# Altium PCB teckduino.PcbDoc
Units mm, origin at the board's own origin, x right, y up, seen from the top; angles counter-clockwise.
Board outline 70 x 54.99 mm, 2 copper layers (Top Layer, Bottom Layer); 42 components, 0 nets, 221 pads, 13 vias.
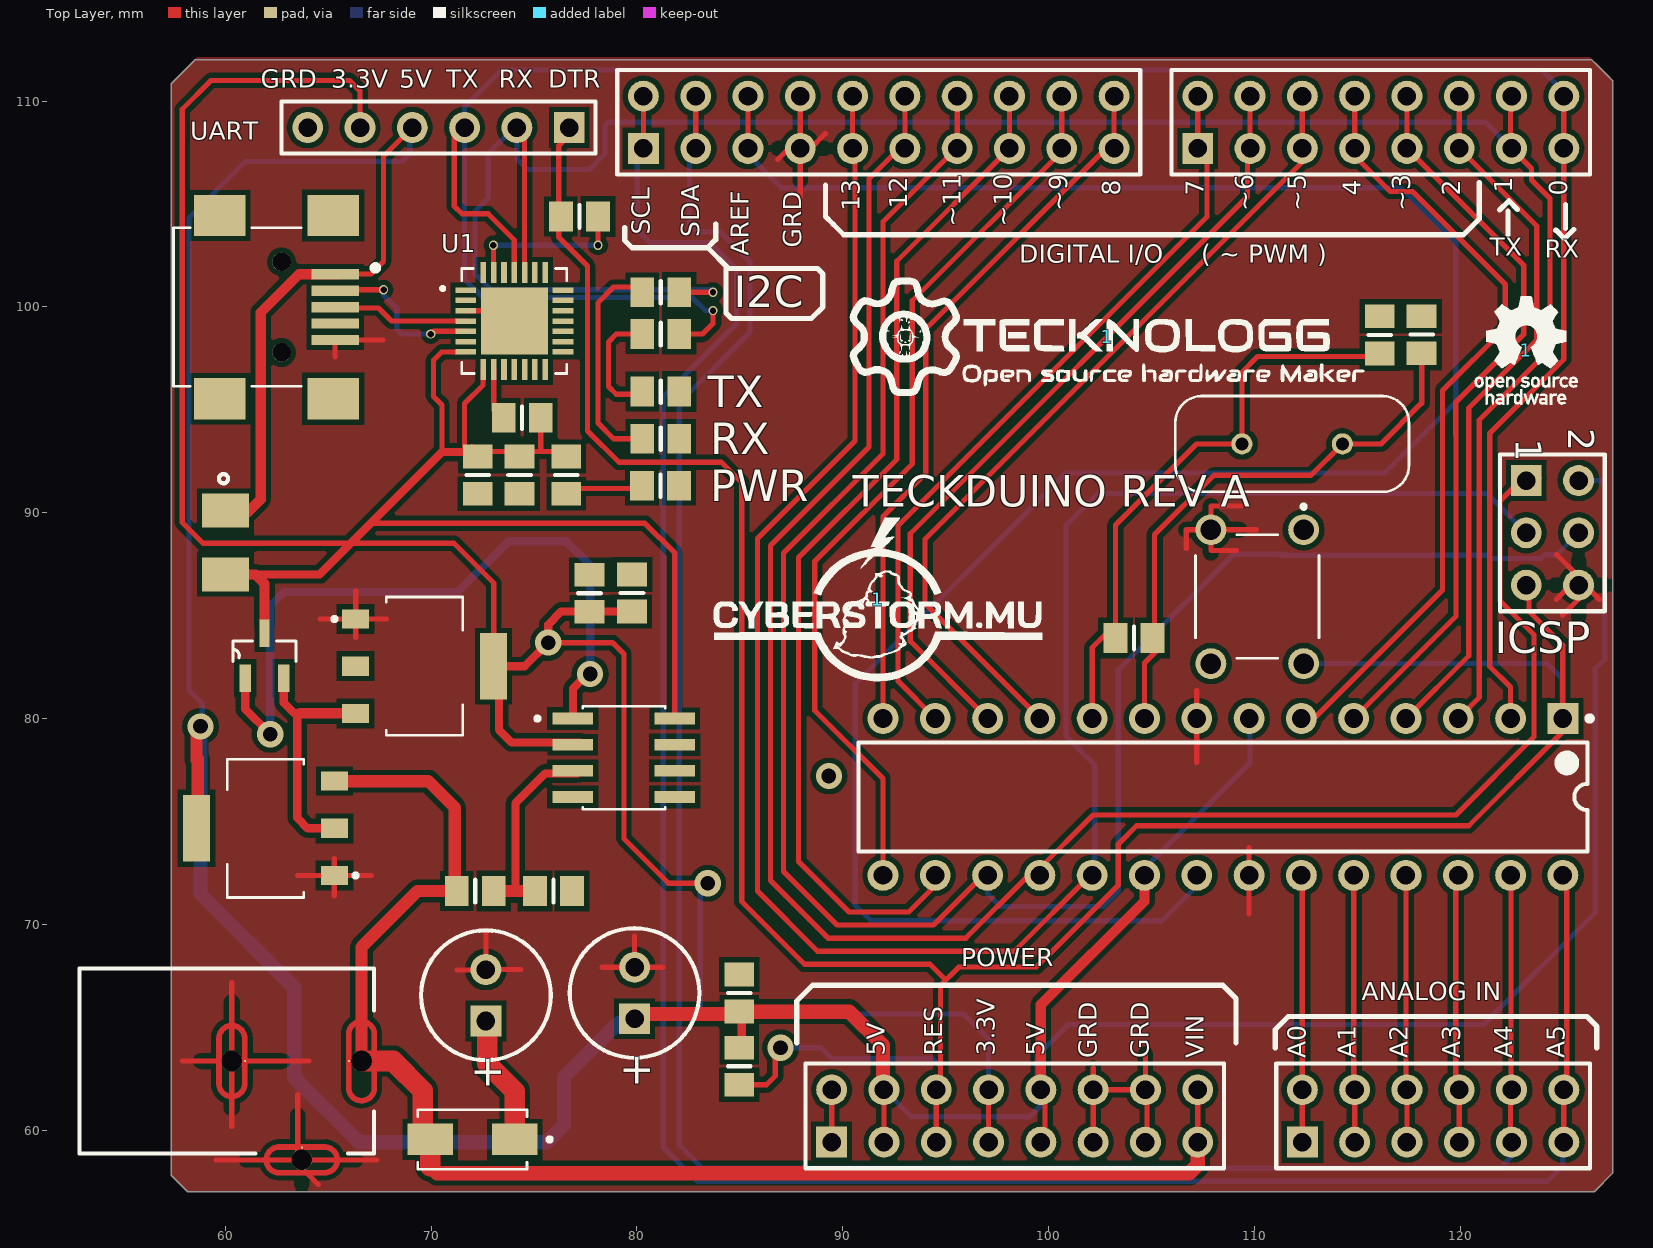
[diagram p0: Top Layer view]
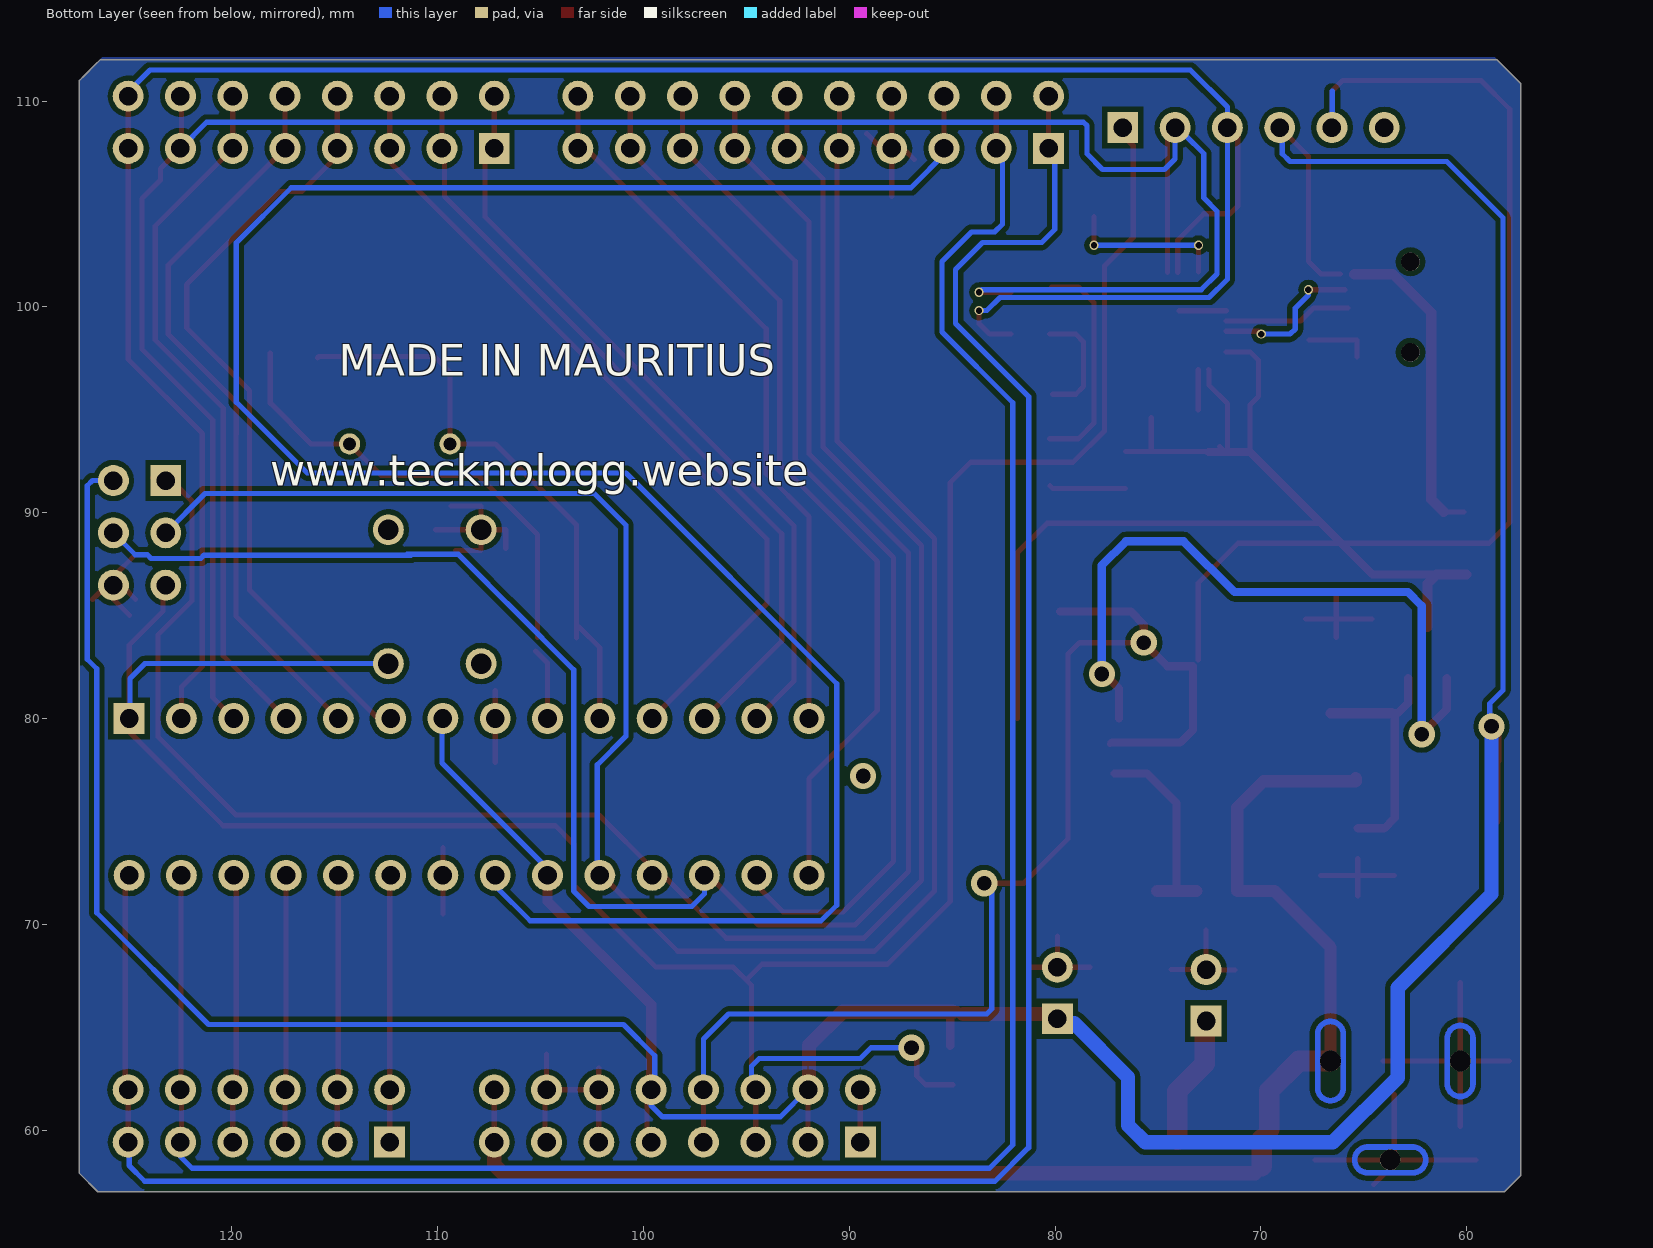
[diagram p1: Bottom Layer view, seen from below]

## Layer stack, top to bottom
Top Solder: solder mask 0.0102, Solder Resist, Dk 3.5
Top Layer: signal copper 0.0356
Dielectric 1: dielectric 0.32, FR-4, Dk 4.8
Bottom Layer: signal copper 0.0356
Bottom Solder: solder mask 0.0102, Solder Resist, Dk 3.5

## Board outline
57.381,57.808 58.166,57.023 126.492,57.023 127.381,57.912 127.381,110.998 127.127,111.252 126.619,111.76 126.365,112.014 58.547,112.014 58.293,111.76 57.381,110.848

## Design rules (kind name [scope] priority, off if disabled: settings)
Clearance [All] p1: gap=0.254 ignorepadtopadclearanceinfootprint=FALSE except(0: Arc-Hole Track-Hole SMDPad-Hole THPad-Hole Via-Hole Fill-Hole Poly-Hole Region-Hole Text-Hole)
PolygonConnect [All] p1: connectstyle=Relief reliefconductorwidth=0.254 reliefentries=4 polygonreliefangle="90 Angle" airgapwidth=0.254
RoutingVias [All] p1: holewidth=0.711 width=1.27 viastyle="Through Hole" minholewidth=0.711 minwidth=1.27 maxholewidth=0.711 maxwidth=1.27
SolderMaskExpansion [All] p1: expansion=0.102
Width [All] p1: maxlimit=0.254 minlimit=0.254 preferedwidth=0.254
30 further rules are at their usual default settings.

## Components (designator, comment, footprint, x,y, rotation, side; value= is the part's Value field where it differs from the comment)
1 "" IMAGE 91.702,85.794 r0 top
1 "" IMAGE 123.19,97.884 r0 top
1 "" IMAGE 102.833,98.552 r0 top
? "Comment" CAPC2012X140N 74.422,94.615 r0 top
? "Comment" SW_1825910-7 110.125,85.928 r270 top
? "Comment" HDR1X6 76.708,108.712 r180 top
? "Comment" CAPC2012X140N 104.14,83.923 r180 top
? "Comment" CAPC2012X140N 118.11,98.653 r270 top
? "Comment" CAPC2012X140N 116.078,98.639 r270 top
? "Comment" XTAL_ECS-60-32-4XDN 111.819,93.345 r180 top
? "Comment" CAPMP3528X210N 60.016,88.556 r270 top
? "Comment" SOT95P237X112-3N 61.908,83.058 r90 top
? "Comment" CAPC2012X140N 84.963,66.675 r90 top
? "Comment" CAPC2012X140N 84.963,63.119 r90 top
? "Comment" CAPC2012X140N 79.756,86.106 r90 top
? "Comment" CAPC2012X140N 77.688,86.095 r90 top
? "Comment" CAPC2012X140N 72.147,71.628 r0 top
? "Comment" CAPC2012X140N 75.946,71.628 r0 top
? "Comment" 94SP-C' 72.661,66.568 r90 top
? "Comment" 94SP-C' 79.883,66.675 r90 top
? "Comment" GCT_DCJ235-05-A-XX-X_REVA 60.071,63.373 r270 top
? "Comment" TE_1734035-3_1734035-3(Primary) 61.688,99.99 r270 top
? "Comment" CAPC2012X140N 81.153,100.711 r180 top
? "Comment" CAPC2012X140N 81.153,98.679 r180 top
? "Comment" CAPC2012X140N 77.205,104.394 r180 top
? "Comment" CAPC2012X140N 81.142,91.313 r180 top
? "Comment" CAPC2012X140N 81.153,93.599 r180 top
? "Comment" CAPC2012X140N 72.263,91.832 r270 top
? "Comment" CAPC2012X140N 74.295,91.832 r90 top
? "Comment" CAPC2012X140N 81.153,95.885 r0 top
? "Comment" CAPC2012X140N 76.562,91.832 r90 top
? "Comment" SOIC127P600X175-8N 79.364,78.105 r0 top
? "Comment" DIOM505270X240_M7(Primary) 72.009,59.563 r180 top
? "Comment" SOT229P700X180-4N 69.68,82.55 r270 top
? "Comment" SOT229P700X180-4N 61.953,74.676 r90 top
? "Comment" HDR2X3 123.19,91.567 r270 top
? "Comment" QFN50P500X500X80-29N 74.041,99.314 r0 top
? "Comment" 28P3 108.458,76.2 r270 top
? "Comment" HDR2X8 107.235,107.696 r0 top
? "Comment" HDR2X8 89.455,59.436 r0 top
? "Comment" HDR2X6 112.315,59.436 r0 top
? "Comment" HDR2X10 80.311,107.696 r0 top

## Footprints (in the part's own frame and the unit in brackets; to place one, negate y for a bottom-side part, rotate by r counter-clockwise, add the part's x,y. Pads: shape width x height; smd on the part's side, far side on the other; paste and mask are expansions set on the pad)
28P3 [mm] "DIP, 28-Leads, Row Spacing 7.62mm, Pitch 2.54mm, Body 34.67x7.3mm"
  rect 1.5x1.5 hole 0.9: 1(-3.81,16.51)
  round 1.5 hole 0.9: 2(-3.81,13.97) 3(-3.81,11.43) 4(-3.81,8.89) 5(-3.81,6.35) 6(-3.81,3.81) 7(-3.81,1.27) 8(-3.81,-1.27) 9(-3.81,-3.81) 10(-3.81,-6.35) 11(-3.81,-8.89) 12(-3.81,-11.43) 13(-3.81,-13.97) 14(-3.81,-16.51) 15(3.81,-16.51) 16(3.81,-13.97) 17(3.81,-11.43) 18(3.81,-8.89) 19(3.81,-6.35) 20(3.81,-3.81) 21(3.81,-1.27) 22(3.81,1.27) 23(3.81,3.81) 24(3.81,6.35) 25(3.81,8.89) 26(3.81,11.43) 27(3.81,13.97) 28(3.81,16.51)
  silkscreen extent -3.93,-17.7 2.65,17.94, body extent -3.6,-17.65 3.6,17.65, height 4.58
94SP-C' [mm] "Capacitor, Electrolytic, Radial; Body 6.3 x 5 mm (Dia.xH typ); Pin Spacing 2.5 mm (typ)"
  rect 1.5x1.5 hole 0.9: 1(-1.25,0)
  round 1.5 hole 0.9: 2(1.25,0)
  silkscreen extent -3.15,-3.15 3.15,3.15
CAPC2012X140N [mm]
  rect 1.15x1.45 smd: 1(-0.9,0) 2(0.9,0)
  silkscreen extent 0,-0.55 0,0.55
CAPMP3528X210N [mm]
  rect 1.65x2.3 smd: 1(-1.55,0) 2(1.55,0)
  silkscreen extent -3.32,-0.32 -2.88,0.12
DIOM505270X240_M7(Primary) [mm]
  rect 2.21x1.53 smd: A(2.05,0) C(-2.05,0)
  silkscreen extent -3.85,-1.45 2.65,1.45
GCT_DCJ235-05-A-XX-X_REVA [mm]
  rect 0.1x0.1 smd: 1(0,5.95) 2(0,0.9) 3(4.2,3.65)
  round 1 hole 1 unplated: None(0,6.55) None(0,0.25) None(4.8,3.65)
  Top Layer region: 0,0.75 0,1 -1.12,1 -1.159,0.998 -1.198,0.994 -1.237,0.988 -1.275,0.98 -1.313,0.969 -1.35,0.957 -1.387,0.943 -1.423,0.927 -1.458,0.909 -1.492,0.89 -1.525,0.868 -1.557,0.845 -1.587,0.821 -1.616,0.794 -1.644,0.766 -1.67,0.737 -1.695,0.707 -1.718,0.675 -1.74,0.642 -1.759,0.608 -1.777,0.573 -1.793,0.537 -1.807,0.5 -1.819,0.463 -1.83,0.425 -1.838,0.387 -1.844,0.348 -1.848,0.309 -1.85,0.27 -1.85,0.23 -1.848,0.191 -1.844,0.152 -1.838,0.113 -1.83,0.075 -1.819,0.037 -1.807,0 -1.793,-0.037 -1.777,-0.073 -1.759,-0.108 -1.74,-0.142 -1.718,-0.175 -1.695,-0.207 -1.67,-0.237 -1.644,-0.266 -1.616,-0.294 -1.587,-0.32 -1.557,-0.345 -1.525,-0.368 -1.492,-0.39 -1.458,-0.409 -1.423,-0.427 -1.387,-0.443 -1.35,-0.457 -1.313,-0.469 -1.275,-0.48 -1.237,-0.488 -1.198,-0.494 -1.159,-0.498 -1.12,-0.5 0,-0.5 0,-0.25 -1.113,-0.25 -1.139,-0.249 -1.165,-0.246 -1.191,-0.242 -1.217,-0.236 -1.242,-0.23 -1.267,-0.221 -1.291,-0.212 -1.315,-0.201 -1.339,-0.19 -1.361,-0.176 -1.383,-0.162 -1.404,-0.147 -1.425,-0.13 -1.444,-0.113 -1.463,-0.094 -1.48,-0.075 -1.497,-0.054 -1.512,-0.033 -1.526,-0.011 -1.54,0.011 -1.551,0.035 -1.562,0.059 -1.571,0.083 -1.58,0.108 -1.586,0.133 -1.592,0.159 -1.596,0.185 -1.599,0.211 -1.6,0.237 -1.6,0.263 -1.599,0.289 -1.596,0.315 -1.592,0.341 -1.586,0.367 -1.58,0.392 -1.571,0.417 -1.562,0.441 -1.551,0.465 -1.54,0.489 -1.526,0.511 -1.512,0.533 -1.497,0.554 -1.48,0.575 -1.463,0.594 -1.444,0.613 -1.425,0.63 -1.404,0.647 -1.383,0.662 -1.361,0.676 -1.339,0.69 -1.315,0.701 -1.291,0.712 -1.267,0.721 -1.242,0.73 -1.217,0.736 -1.191,0.742 -1.165,0.746 -1.139,0.749 -1.113,0.75
  Top Layer region: 0,-0.25 0,-0.5 1.12,-0.5 1.159,-0.498 1.198,-0.494 1.237,-0.488 1.275,-0.48 1.313,-0.469 1.35,-0.457 1.387,-0.443 1.423,-0.427 1.458,-0.409 1.492,-0.39 1.525,-0.368 1.557,-0.345 1.587,-0.321 1.616,-0.294 1.644,-0.266 1.67,-0.237 1.695,-0.207 1.718,-0.175 1.74,-0.142 1.759,-0.108 1.777,-0.073 1.793,-0.037 1.807,0 1.819,0.037 1.83,0.075 1.838,0.113 1.844,0.152 1.848,0.191 1.85,0.23 1.85,0.27 1.848,0.309 1.844,0.348 1.838,0.387 1.83,0.425 1.819,0.463 1.807,0.5 1.793,0.537 1.777,0.573 1.759,0.608 1.74,0.642 1.718,0.675 1.695,0.707 1.67,0.737 1.644,0.766 1.616,0.794 1.587,0.82 1.557,0.845 1.525,0.868 1.492,0.89 1.458,0.909 1.423,0.927 1.387,0.943 1.35,0.957 1.313,0.969 1.275,0.98 1.237,0.988 1.198,0.994 1.159,0.998 1.12,1 0,1 0,0.75 1.113,0.75 1.139,0.749 1.165,0.746 1.191,0.742 1.217,0.736 1.242,0.73 1.267,0.721 1.291,0.712 1.315,0.701 1.339,0.69 1.361,0.676 1.383,0.662 1.404,0.647 1.425,0.63 1.444,0.613 1.463,0.594 1.48,0.575 1.497,0.554 1.512,0.533 1.526,0.511 1.54,0.489 1.551,0.465 1.562,0.441 1.571,0.417 1.58,0.392 1.586,0.367 1.592,0.341 1.596,0.315 1.599,0.289 1.6,0.263 1.6,0.237 1.599,0.211 1.596,0.185 1.592,0.159 1.586,0.133 1.58,0.108 1.571,0.083 1.562,0.059 1.551,0.035 1.54,0.011 1.526,-0.011 1.512,-0.033 1.497,-0.054 1.48,-0.075 1.463,-0.094 1.444,-0.113 1.425,-0.13 1.404,-0.147 1.383,-0.162 1.361,-0.176 1.339,-0.19 1.315,-0.201 1.291,-0.212 1.267,-0.221 1.242,-0.23 1.217,-0.236 1.191,-0.242 1.165,-0.246 1.139,-0.249 1.113,-0.25
  Top Layer region: 4.3,3.65 4.05,3.65 4.05,2.53 4.052,2.491 4.056,2.452 4.062,2.413 4.07,2.375 4.081,2.337 4.093,2.3 4.107,2.263 4.123,2.227 4.141,2.192 4.16,2.158 4.182,2.125 4.205,2.093 4.229,2.063 4.256,2.034 4.284,2.006 4.313,1.98 4.343,1.955 4.375,1.932 4.408,1.91 4.442,1.891 4.477,1.873 4.513,1.857 4.55,1.843 4.587,1.831 4.625,1.82 4.663,1.812 4.702,1.806 4.741,1.802 4.78,1.8 4.82,1.8 4.859,1.802 4.898,1.806 4.937,1.812 4.975,1.82 5.013,1.831 5.05,1.843 5.087,1.857 5.123,1.873 5.158,1.891 5.192,1.91 5.225,1.932 5.257,1.955 5.287,1.98 5.316,2.006 5.344,2.034 5.37,2.063 5.395,2.093 5.418,2.125 5.44,2.158 5.459,2.192 5.477,2.227 5.493,2.263 5.507,2.3 5.519,2.337 5.53,2.375 5.538,2.413 5.544,2.452 5.548,2.491 5.55,2.53 5.55,3.65 5.3,3.65 5.3,2.537 5.299,2.511 5.296,2.485 5.292,2.459 5.286,2.433 5.28,2.408 5.271,2.383 5.262,2.359 5.251,2.335 5.24,2.311 5.226,2.289 5.212,2.267 5.197,2.246 5.18,2.225 5.163,2.206 5.144,2.187 5.125,2.17 5.104,2.153 5.083,2.138 5.061,2.124 5.039,2.11 5.015,2.099 4.991,2.088 4.967,2.079 4.942,2.07 4.917,2.064 4.891,2.058 4.865,2.054 4.839,2.051 4.813,2.05 4.787,2.05 4.761,2.051 4.735,2.054 4.709,2.058 4.683,2.064 4.658,2.07 4.633,2.079 4.609,2.088 4.585,2.099 4.561,2.11 4.539,2.124 4.517,2.138 4.496,2.153 4.475,2.17 4.456,2.187 4.437,2.206 4.42,2.225 4.403,2.246 4.388,2.267 4.374,2.289 4.36,2.311 4.349,2.335 4.338,2.359 4.329,2.383 4.32,2.408 4.314,2.433 4.308,2.459 4.304,2.485 4.301,2.511 4.3,2.537
  Top Layer region: 5.3,3.65 5.55,3.65 5.55,4.77 5.548,4.809 5.544,4.848 5.538,4.887 5.53,4.925 5.519,4.963 5.507,5 5.493,5.037 5.477,5.073 5.459,5.108 5.44,5.142 5.418,5.175 5.395,5.207 5.37,5.237 5.344,5.266 5.316,5.294 5.287,5.32 5.257,5.345 5.225,5.368 5.192,5.39 5.158,5.409 5.123,5.427 5.087,5.443 5.05,5.457 5.013,5.469 4.975,5.48 4.937,5.488 4.898,5.494 4.859,5.498 4.82,5.5 4.78,5.5 4.741,5.498 4.702,5.494 4.663,5.488 4.625,5.48 4.587,5.469 4.55,5.457 4.513,5.443 4.477,5.427 4.442,5.409 4.408,5.39 4.375,5.368 4.343,5.345 4.313,5.32 4.284,5.294 4.256,5.266 4.229,5.237 4.205,5.207 4.182,5.175 4.16,5.142 4.141,5.108 4.123,5.073 4.107,5.037 4.093,5 4.081,4.963 4.07,4.925 4.062,4.887 4.056,4.848 4.052,4.809 4.05,4.77 4.05,3.65 4.3,3.65 4.3,4.763 4.301,4.789 4.304,4.815 4.308,4.841 4.314,4.867 4.32,4.892 4.329,4.917 4.338,4.941 4.349,4.965 4.36,4.989 4.374,5.011 4.388,5.033 4.403,5.054 4.42,5.075 4.437,5.094 4.456,5.113 4.475,5.13 4.496,5.147 4.517,5.162 4.539,5.176 4.561,5.19 4.585,5.201 4.609,5.212 4.633,5.221 4.658,5.23 4.683,5.236 4.709,5.242 4.735,5.246 4.761,5.249 4.787,5.25 4.813,5.25 4.839,5.249 4.865,5.246 4.891,5.242 4.917,5.236 4.942,5.23 4.967,5.221 4.991,5.212 5.015,5.201 5.039,5.19 5.061,5.176 5.083,5.162 5.104,5.147 5.125,5.13 5.144,5.113 5.163,5.094 5.18,5.075 5.197,5.054 5.212,5.033 5.226,5.011 5.24,4.989 5.251,4.965 5.262,4.941 5.271,4.917 5.28,4.892 5.286,4.867 5.292,4.841 5.296,4.815 5.299,4.789 5.3,4.763
  Top Layer region: 0,7.05 0,7.3 -1.32,7.3 -1.359,7.298 -1.398,7.294 -1.437,7.288 -1.475,7.28 -1.513,7.269 -1.55,7.257 -1.587,7.243 -1.623,7.227 -1.658,7.209 -1.692,7.19 -1.725,7.168 -1.757,7.145 -1.787,7.12 -1.816,7.094 -1.844,7.066 -1.87,7.037 -1.895,7.007 -1.918,6.975 -1.94,6.942 -1.959,6.908 -1.977,6.873 -1.993,6.837 -2.007,6.8 -2.019,6.763 -2.03,6.725 -2.038,6.687 -2.044,6.648 -2.048,6.609 -2.05,6.57 -2.05,6.53 -2.048,6.491 -2.044,6.452 -2.038,6.413 -2.03,6.375 -2.019,6.337 -2.007,6.3 -1.993,6.263 -1.977,6.227 -1.959,6.192 -1.94,6.158 -1.918,6.125 -1.895,6.093 -1.87,6.063 -1.844,6.034 -1.816,6.006 -1.787,5.98 -1.757,5.955 -1.725,5.932 -1.692,5.91 -1.658,5.891 -1.623,5.873 -1.587,5.857 -1.55,5.843 -1.513,5.831 -1.475,5.82 -1.437,5.812 -1.398,5.806 -1.359,5.802 -1.32,5.8 0,5.8 0,6.05 -1.313,6.05 -1.339,6.051 -1.365,6.054 -1.391,6.058 -1.417,6.064 -1.442,6.07 -1.467,6.079 -1.491,6.088 -1.515,6.099 -1.539,6.11 -1.561,6.124 -1.583,6.138 -1.604,6.153 -1.625,6.17 -1.644,6.187 -1.663,6.206 -1.68,6.225 -1.697,6.246 -1.712,6.267 -1.726,6.289 -1.74,6.311 -1.751,6.335 -1.762,6.359 -1.771,6.383 -1.78,6.408 -1.786,6.433 -1.792,6.459 -1.796,6.485 -1.799,6.511 -1.8,6.537 -1.8,6.563 -1.799,6.589 -1.796,6.615 -1.792,6.641 -1.786,6.667 -1.78,6.692 -1.771,6.717 -1.762,6.741 -1.751,6.765 -1.74,6.789 -1.726,6.811 -1.712,6.833 -1.697,6.854 -1.68,6.875 -1.663,6.894 -1.644,6.913 -1.625,6.93 -1.604,6.947 -1.583,6.962 -1.561,6.976 -1.539,6.99 -1.515,7.001 -1.491,7.012 -1.467,7.021 -1.442,7.03 -1.417,7.036 -1.391,7.042 -1.365,7.046 -1.339,7.049 -1.313,7.05
  Top Layer region: 0,6.05 0,5.8 1.32,5.8 1.359,5.802 1.398,5.806 1.437,5.812 1.475,5.82 1.513,5.831 1.55,5.843 1.587,5.857 1.623,5.873 1.658,5.891 1.692,5.91 1.725,5.932 1.757,5.955 1.787,5.98 1.816,6.006 1.844,6.034 1.87,6.063 1.895,6.093 1.918,6.125 1.94,6.158 1.959,6.192 1.977,6.227 1.993,6.263 2.007,6.3 2.019,6.337 2.03,6.375 2.038,6.413 2.044,6.452 2.048,6.491 2.05,6.53 2.05,6.57 2.048,6.609 2.044,6.648 2.038,6.687 2.03,6.725 2.019,6.763 2.007,6.8 1.993,6.837 1.977,6.873 1.959,6.908 1.94,6.942 1.918,6.975 1.895,7.007 1.87,7.037 1.844,7.066 1.816,7.094 1.787,7.12 1.757,7.145 1.725,7.168 1.692,7.19 1.658,7.209 1.623,7.227 1.587,7.243 1.55,7.257 1.513,7.269 1.475,7.28 1.437,7.288 1.398,7.294 1.359,7.298 1.32,7.3 0,7.3 0,7.05 1.313,7.05 1.339,7.049 1.365,7.046 1.391,7.042 1.417,7.036 1.442,7.03 1.467,7.021 1.491,7.012 1.515,7.001 1.539,6.99 1.561,6.976 1.583,6.962 1.604,6.947 1.625,6.93 1.644,6.913 1.663,6.894 1.68,6.875 1.697,6.854 1.712,6.833 1.726,6.811 1.74,6.789 1.751,6.765 1.762,6.741 1.771,6.717 1.78,6.692 1.786,6.667 1.792,6.641 1.796,6.615 1.799,6.589 1.8,6.563 1.8,6.537 1.799,6.511 1.796,6.485 1.792,6.459 1.786,6.433 1.78,6.408 1.771,6.383 1.762,6.359 1.751,6.335 1.74,6.311 1.726,6.289 1.712,6.267 1.697,6.246 1.68,6.225 1.663,6.206 1.644,6.187 1.625,6.17 1.604,6.153 1.583,6.138 1.561,6.124 1.539,6.11 1.515,6.099 1.491,6.088 1.467,6.079 1.442,6.07 1.417,6.064 1.391,6.058 1.365,6.054 1.339,6.051 1.313,6.05
  Bottom Layer region: 0,0.75 0,1 -1.12,1 -1.159,0.998 -1.198,0.994 -1.237,0.988 -1.275,0.98 -1.313,0.969 -1.35,0.957 -1.387,0.943 -1.423,0.927 -1.458,0.909 -1.492,0.89 -1.525,0.868 -1.557,0.845 -1.587,0.821 -1.616,0.794 -1.644,0.766 -1.67,0.737 -1.695,0.707 -1.718,0.675 -1.74,0.642 -1.759,0.608 -1.777,0.573 -1.793,0.537 -1.807,0.5 -1.819,0.463 -1.83,0.425 -1.838,0.387 -1.844,0.348 -1.848,0.309 -1.85,0.27 -1.85,0.23 -1.848,0.191 -1.844,0.152 -1.838,0.113 -1.83,0.075 -1.819,0.037 -1.807,0 -1.793,-0.037 -1.777,-0.073 -1.759,-0.108 -1.74,-0.142 -1.718,-0.175 -1.695,-0.207 -1.67,-0.237 -1.644,-0.266 -1.616,-0.294 -1.587,-0.32 -1.557,-0.345 -1.525,-0.368 -1.492,-0.39 -1.458,-0.409 -1.423,-0.427 -1.387,-0.443 -1.35,-0.457 -1.313,-0.469 -1.275,-0.48 -1.237,-0.488 -1.198,-0.494 -1.159,-0.498 -1.12,-0.5 0,-0.5 0,-0.25 -1.113,-0.25 -1.139,-0.249 -1.165,-0.246 -1.191,-0.242 -1.217,-0.236 -1.242,-0.23 -1.267,-0.221 -1.291,-0.212 -1.315,-0.201 -1.339,-0.19 -1.361,-0.176 -1.383,-0.162 -1.404,-0.147 -1.425,-0.13 -1.444,-0.113 -1.463,-0.094 -1.48,-0.075 -1.497,-0.054 -1.512,-0.033 -1.526,-0.011 -1.54,0.011 -1.551,0.035 -1.562,0.059 -1.571,0.083 -1.58,0.108 -1.586,0.133 -1.592,0.159 -1.596,0.185 -1.599,0.211 -1.6,0.237 -1.6,0.263 -1.599,0.289 -1.596,0.315 -1.592,0.341 -1.586,0.367 -1.58,0.392 -1.571,0.417 -1.562,0.441 -1.551,0.465 -1.54,0.489 -1.526,0.511 -1.512,0.533 -1.497,0.554 -1.48,0.575 -1.463,0.594 -1.444,0.613 -1.425,0.63 -1.404,0.647 -1.383,0.662 -1.361,0.676 -1.339,0.69 -1.315,0.701 -1.291,0.712 -1.267,0.721 -1.242,0.73 -1.217,0.736 -1.191,0.742 -1.165,0.746 -1.139,0.749 -1.113,0.75
  Bottom Layer region: 0,-0.25 0,-0.5 1.12,-0.5 1.159,-0.498 1.198,-0.494 1.237,-0.488 1.275,-0.48 1.313,-0.469 1.35,-0.457 1.387,-0.443 1.423,-0.427 1.458,-0.409 1.492,-0.39 1.525,-0.368 1.557,-0.345 1.587,-0.321 1.616,-0.294 1.644,-0.266 1.67,-0.237 1.695,-0.207 1.718,-0.175 1.74,-0.142 1.759,-0.108 1.777,-0.073 1.793,-0.037 1.807,0 1.819,0.037 1.83,0.075 1.838,0.113 1.844,0.152 1.848,0.191 1.85,0.23 1.85,0.27 1.848,0.309 1.844,0.348 1.838,0.387 1.83,0.425 1.819,0.463 1.807,0.5 1.793,0.537 1.777,0.573 1.759,0.608 1.74,0.642 1.718,0.675 1.695,0.707 1.67,0.737 1.644,0.766 1.616,0.794 1.587,0.82 1.557,0.845 1.525,0.868 1.492,0.89 1.458,0.909 1.423,0.927 1.387,0.943 1.35,0.957 1.313,0.969 1.275,0.98 1.237,0.988 1.198,0.994 1.159,0.998 1.12,1 0,1 0,0.75 1.113,0.75 1.139,0.749 1.165,0.746 1.191,0.742 1.217,0.736 1.242,0.73 1.267,0.721 1.291,0.712 1.315,0.701 1.339,0.69 1.361,0.676 1.383,0.662 1.404,0.647 1.425,0.63 1.444,0.613 1.463,0.594 1.48,0.575 1.497,0.554 1.512,0.533 1.526,0.511 1.54,0.489 1.551,0.465 1.562,0.441 1.571,0.417 1.58,0.392 1.586,0.367 1.592,0.341 1.596,0.315 1.599,0.289 1.6,0.263 1.6,0.237 1.599,0.211 1.596,0.185 1.592,0.159 1.586,0.133 1.58,0.108 1.571,0.083 1.562,0.059 1.551,0.035 1.54,0.011 1.526,-0.011 1.512,-0.033 1.497,-0.054 1.48,-0.075 1.463,-0.094 1.444,-0.113 1.425,-0.13 1.404,-0.147 1.383,-0.162 1.361,-0.176 1.339,-0.19 1.315,-0.201 1.291,-0.212 1.267,-0.221 1.242,-0.23 1.217,-0.236 1.191,-0.242 1.165,-0.246 1.139,-0.249 1.113,-0.25
  Bottom Layer region: 4.3,3.65 4.05,3.65 4.05,2.53 4.052,2.491 4.056,2.452 4.062,2.413 4.07,2.375 4.081,2.337 4.093,2.3 4.107,2.263 4.123,2.227 4.141,2.192 4.16,2.158 4.182,2.125 4.205,2.093 4.229,2.063 4.256,2.034 4.284,2.006 4.313,1.98 4.343,1.955 4.375,1.932 4.408,1.91 4.442,1.891 4.477,1.873 4.513,1.857 4.55,1.843 4.587,1.831 4.625,1.82 4.663,1.812 4.702,1.806 4.741,1.802 4.78,1.8 4.82,1.8 4.859,1.802 4.898,1.806 4.937,1.812 4.975,1.82 5.013,1.831 5.05,1.843 5.087,1.857 5.123,1.873 5.158,1.891 5.192,1.91 5.225,1.932 5.257,1.955 5.287,1.98 5.316,2.006 5.344,2.034 5.37,2.063 5.395,2.093 5.418,2.125 5.44,2.158 5.459,2.192 5.477,2.227 5.493,2.263 5.507,2.3 5.519,2.337 5.53,2.375 5.538,2.413 5.544,2.452 5.548,2.491 5.55,2.53 5.55,3.65 5.3,3.65 5.3,2.537 5.299,2.511 5.296,2.485 5.292,2.459 5.286,2.433 5.28,2.408 5.271,2.383 5.262,2.359 5.251,2.335 5.24,2.311 5.226,2.289 5.212,2.267 5.197,2.246 5.18,2.225 5.163,2.206 5.144,2.187 5.125,2.17 5.104,2.153 5.083,2.138 5.061,2.124 5.039,2.11 5.015,2.099 4.991,2.088 4.967,2.079 4.942,2.07 4.917,2.064 4.891,2.058 4.865,2.054 4.839,2.051 4.813,2.05 4.787,2.05 4.761,2.051 4.735,2.054 4.709,2.058 4.683,2.064 4.658,2.07 4.633,2.079 4.609,2.088 4.585,2.099 4.561,2.11 4.539,2.124 4.517,2.138 4.496,2.153 4.475,2.17 4.456,2.187 4.437,2.206 4.42,2.225 4.403,2.246 4.388,2.267 4.374,2.289 4.36,2.311 4.349,2.335 4.338,2.359 4.329,2.383 4.32,2.408 4.314,2.433 4.308,2.459 4.304,2.485 4.301,2.511 4.3,2.537
  Bottom Layer region: 5.3,3.65 5.55,3.65 5.55,4.77 5.548,4.809 5.544,4.848 5.538,4.887 5.53,4.925 5.519,4.963 5.507,5 5.493,5.037 5.477,5.073 5.459,5.108 5.44,5.142 5.418,5.175 5.395,5.207 5.37,5.237 5.344,5.266 5.316,5.294 5.287,5.32 5.257,5.345 5.225,5.368 5.192,5.39 5.158,5.409 5.123,5.427 5.087,5.443 5.05,5.457 5.013,5.469 4.975,5.48 4.937,5.488 4.898,5.494 4.859,5.498 4.82,5.5 4.78,5.5 4.741,5.498 4.702,5.494 4.663,5.488 4.625,5.48 4.587,5.469 4.55,5.457 4.513,5.443 4.477,5.427 4.442,5.409 4.408,5.39 4.375,5.368 4.343,5.345 4.313,5.32 4.284,5.294 4.256,5.266 4.229,5.237 4.205,5.207 4.182,5.175 4.16,5.142 4.141,5.108 4.123,5.073 4.107,5.037 4.093,5 4.081,4.963 4.07,4.925 4.062,4.887 4.056,4.848 4.052,4.809 4.05,4.77 4.05,3.65 4.3,3.65 4.3,4.763 4.301,4.789 4.304,4.815 4.308,4.841 4.314,4.867 4.32,4.892 4.329,4.917 4.338,4.941 4.349,4.965 4.36,4.989 4.374,5.011 4.388,5.033 4.403,5.054 4.42,5.075 4.437,5.094 4.456,5.113 4.475,5.13 4.496,5.147 4.517,5.162 4.539,5.176 4.561,5.19 4.585,5.201 4.609,5.212 4.633,5.221 4.658,5.23 4.683,5.236 4.709,5.242 4.735,5.246 4.761,5.249 4.787,5.25 4.813,5.25 4.839,5.249 4.865,5.246 4.891,5.242 4.917,5.236 4.942,5.23 4.967,5.221 4.991,5.212 5.015,5.201 5.039,5.19 5.061,5.176 5.083,5.162 5.104,5.147 5.125,5.13 5.144,5.113 5.163,5.094 5.18,5.075 5.197,5.054 5.212,5.033 5.226,5.011 5.24,4.989 5.251,4.965 5.262,4.941 5.271,4.917 5.28,4.892 5.286,4.867 5.292,4.841 5.296,4.815 5.299,4.789 5.3,4.763
  Bottom Layer region: 0,7.05 0,7.3 -1.32,7.3 -1.359,7.298 -1.398,7.294 -1.437,7.288 -1.475,7.28 -1.513,7.269 -1.55,7.257 -1.587,7.243 -1.623,7.227 -1.658,7.209 -1.692,7.19 -1.725,7.168 -1.757,7.145 -1.787,7.12 -1.816,7.094 -1.844,7.066 -1.87,7.037 -1.895,7.007 -1.918,6.975 -1.94,6.942 -1.959,6.908 -1.977,6.873 -1.993,6.837 -2.007,6.8 -2.019,6.763 -2.03,6.725 -2.038,6.687 -2.044,6.648 -2.048,6.609 -2.05,6.57 -2.05,6.53 -2.048,6.491 -2.044,6.452 -2.038,6.413 -2.03,6.375 -2.019,6.337 -2.007,6.3 -1.993,6.263 -1.977,6.227 -1.959,6.192 -1.94,6.158 -1.918,6.125 -1.895,6.093 -1.87,6.063 -1.844,6.034 -1.816,6.006 -1.787,5.98 -1.757,5.955 -1.725,5.932 -1.692,5.91 -1.658,5.891 -1.623,5.873 -1.587,5.857 -1.55,5.843 -1.513,5.831 -1.475,5.82 -1.437,5.812 -1.398,5.806 -1.359,5.802 -1.32,5.8 0,5.8 0,6.05 -1.313,6.05 -1.339,6.051 -1.365,6.054 -1.391,6.058 -1.417,6.064 -1.442,6.07 -1.467,6.079 -1.491,6.088 -1.515,6.099 -1.539,6.11 -1.561,6.124 -1.583,6.138 -1.604,6.153 -1.625,6.17 -1.644,6.187 -1.663,6.206 -1.68,6.225 -1.697,6.246 -1.712,6.267 -1.726,6.289 -1.74,6.311 -1.751,6.335 -1.762,6.359 -1.771,6.383 -1.78,6.408 -1.786,6.433 -1.792,6.459 -1.796,6.485 -1.799,6.511 -1.8,6.537 -1.8,6.563 -1.799,6.589 -1.796,6.615 -1.792,6.641 -1.786,6.667 -1.78,6.692 -1.771,6.717 -1.762,6.741 -1.751,6.765 -1.74,6.789 -1.726,6.811 -1.712,6.833 -1.697,6.854 -1.68,6.875 -1.663,6.894 -1.644,6.913 -1.625,6.93 -1.604,6.947 -1.583,6.962 -1.561,6.976 -1.539,6.99 -1.515,7.001 -1.491,7.012 -1.467,7.021 -1.442,7.03 -1.417,7.036 -1.391,7.042 -1.365,7.046 -1.339,7.049 -1.313,7.05
  Bottom Layer region: 0,6.05 0,5.8 1.32,5.8 1.359,5.802 1.398,5.806 1.437,5.812 1.475,5.82 1.513,5.831 1.55,5.843 1.587,5.857 1.623,5.873 1.658,5.891 1.692,5.91 1.725,5.932 1.757,5.955 1.787,5.98 1.816,6.006 1.844,6.034 1.87,6.063 1.895,6.093 1.918,6.125 1.94,6.158 1.959,6.192 1.977,6.227 1.993,6.263 2.007,6.3 2.019,6.337 2.03,6.375 2.038,6.413 2.044,6.452 2.048,6.491 2.05,6.53 2.05,6.57 2.048,6.609 2.044,6.648 2.038,6.687 2.03,6.725 2.019,6.763 2.007,6.8 1.993,6.837 1.977,6.873 1.959,6.908 1.94,6.942 1.918,6.975 1.895,7.007 1.87,7.037 1.844,7.066 1.816,7.094 1.787,7.12 1.757,7.145 1.725,7.168 1.692,7.19 1.658,7.209 1.623,7.227 1.587,7.243 1.55,7.257 1.513,7.269 1.475,7.28 1.437,7.288 1.398,7.294 1.359,7.298 1.32,7.3 0,7.3 0,7.05 1.313,7.05 1.339,7.049 1.365,7.046 1.391,7.042 1.417,7.036 1.442,7.03 1.467,7.021 1.491,7.012 1.515,7.001 1.539,6.99 1.561,6.976 1.583,6.962 1.604,6.947 1.625,6.93 1.644,6.913 1.663,6.894 1.68,6.875 1.697,6.854 1.712,6.833 1.726,6.811 1.74,6.789 1.751,6.765 1.762,6.741 1.771,6.717 1.78,6.692 1.786,6.667 1.792,6.641 1.796,6.615 1.799,6.589 1.8,6.563 1.8,6.537 1.799,6.511 1.796,6.485 1.792,6.459 1.786,6.433 1.78,6.408 1.771,6.383 1.762,6.359 1.751,6.335 1.74,6.311 1.726,6.289 1.712,6.267 1.697,6.246 1.68,6.225 1.663,6.206 1.644,6.187 1.625,6.17 1.604,6.153 1.583,6.138 1.561,6.124 1.539,6.11 1.515,6.099 1.491,6.088 1.467,6.079 1.442,6.07 1.417,6.064 1.391,6.058 1.365,6.054 1.339,6.051 1.313,6.05
  silkscreen extent -4.5,-7.15 4.5,7.15
HDR1X6 [mm] "Connector; Header; 6 Position"
  rect 1.5x1.5 hole 0.9: 1(0,0)
  round 1.5 hole 0.9: 2(2.54,0) 3(5.08,0) 4(7.62,0) 5(10.16,0) 6(12.7,0)
  silkscreen extent -1.27,-1.27 13.97,1.27
HDR2X3 [mm] "Connector; Header; 3x2 Position"
  rect 1.5x1.5 hole 0.9: 1(0,0)
  round 1.5 hole 0.9: 2(0,2.54) 3(2.54,0) 4(2.54,2.54) 5(5.08,0) 6(5.08,2.54)
  silkscreen extent -1.27,-1.27 6.35,3.81
HDR2X6 [mm] "Connector; Header; 6x2 Position"
  rect 1.5x1.5 hole 0.9: 1(0,0)
  round 1.5 hole 0.9: 2(0,2.54) 3(2.54,0) 4(2.54,2.54) 5(5.08,0) 6(5.08,2.54) 7(7.62,0) 8(7.62,2.54) 9(10.16,0) 10(10.16,2.54) 11(12.7,0) 12(12.7,2.54)
  silkscreen extent -1.27,-1.27 13.97,3.81
HDR2X8 [mm] "Connector; Header; 8x2 Position"
  rect 1.5x1.5 hole 0.9: 1(0,0)
  round 1.5 hole 0.9: 2(0,2.54) 3(2.54,0) 4(2.54,2.54) 5(5.08,0) 6(5.08,2.54) 7(7.62,0) 8(7.62,2.54) 9(10.16,0) 10(10.16,2.54) 11(12.7,0) 12(12.7,2.54) 13(15.24,0) 14(15.24,2.54) 15(17.78,0) 16(17.78,2.54)
  silkscreen extent -1.27,-1.27 19.05,3.81
HDR2X10 [mm] "Connector; Header; 10x2 Position"
  rect 1.5x1.5 hole 0.9: 1(0,0)
  round 1.5 hole 0.9: 2(0,2.54) 3(2.54,0) 4(2.54,2.54) 5(5.08,0) 6(5.08,2.54) 7(7.62,0) 8(7.62,2.54) 9(10.16,0) 10(10.16,2.54) 11(12.7,0) 12(12.7,2.54) 13(15.24,0) 14(15.24,2.54) 15(17.78,0) 16(17.78,2.54) 17(20.32,0) 18(20.32,2.54) 19(22.86,0) 20(22.86,2.54)
  silkscreen extent -1.27,-1.27 24.13,3.81
IMAGE [mm]
  silkscreen extent -7.98,-3.97 7.98,3.97
QFN50P500X500X80-29N [mm]
  rect 1.01x0.27 smd: 1(-2.36,1.5) 2(-2.36,1) 3(-2.36,0.5) 4(-2.36,0) 5(-2.36,-0.5) 6(-2.36,-1) 7(-2.36,-1.5) 15(2.36,-1.5) 16(2.36,-1) 17(2.36,-0.5) 18(2.36,0) 19(2.36,0.5) 20(2.36,1) 21(2.36,1.5)
  rect 0.27x1.01 smd: 8(-1.5,-2.36) 9(-1,-2.36) 10(-0.5,-2.36) 11(0,-2.36) 12(0.5,-2.36) 13(1,-2.36) 14(1.5,-2.36) 22(1.5,2.36) 23(1,2.36) 24(0.5,2.36) 25(0,2.36) 26(-0.5,2.36) 27(-1,2.36) 28(-1.5,2.36)
  rect 3.25x3.25 smd: 29(0,0)
  silkscreen extent -3.55,-2.55 2.55,2.55
SOIC127P600X175-8N [mm]
  rect 1.97x0.57 smd: 1(-2.475,1.905) 2(-2.475,0.635) 3(-2.475,-0.635) 4(-2.475,-1.905) 5(2.475,-1.905) 6(2.475,-0.635) 7(2.475,0.635) 8(2.475,1.905)
  silkscreen extent -4.3,-2.5 2,2.5
SOT95P237X112-3N [mil]
  rect 52x22 smd: 1(-43,37) 2(-43,-37)
  rect 52x20 smd: 3(43,0)
  silkscreen extent -11,-60 28,60
SOT229P700X180-4N [mm]
  rect 0.93x1.31 smd: 1(-2.29,-3.345) 2(0,-3.345) 3(2.29,-3.345)
  rect 3.24x1.31 smd: 4(0,3.345)
  silkscreen extent -3.36,-4.47 3.36,1.86
SW_1825910-7 [mm]
  round 1.498 hole 0.99: 1(-3.25,2.25) 2(3.25,2.25) 3(-3.25,-2.25) 4(3.25,-2.25)
  silkscreen extent -4.47,-3 3,3
TE_1734035-3_1734035-3(Primary) [mm]
  rect 0.5x2.3 smd: 1(-1.6,3.65) 2(-0.8,3.65) 3(0,3.65) 4(0.8,3.65) 5(1.6,3.65)
  round 0.9 hole 0.9 unplated: None(-2.2,1.05) None(2.2,1.05)
  rect 2x2.5 smd: SH1(4.45,3.55) SH2(4.45,-1.95) SH3(-4.45,-1.95) SH4(-4.45,3.55)
  silkscreen extent -3.85,-4.2 3.85,5.69
XTAL_ECS-60-32-4XDN [mm]
  round 1.03 hole 0.63: 1(-2.44,0) 2(2.44,0)
  silkscreen extent -5.68,-2.33 5.68,2.33

## Via types
v1: diameter 1.27, hole 0.711, Top Layer to Bottom Layer, 7 vias
v2: diameter 0.45, hole 0.311, Top Layer to Bottom Layer, 6 vias

## Nets (pads, with @x,y where several pads share a name; then routed paths per layer and width w, separated by ;. In a path a pad name is that pad's centre, name@x,y a point inside that pad or via, vN(x,y) a via of type N, cw(c..) or ccw(c..) an arc to the next point about the centre after c; other vN are vias at no path point)
pads on no net: ?.1 ?.2 ?.3 ?.4 ?.5 ?.6 ?.7 ?.8 ?.9 ?.10 ?.11 ?.12 ?.13 ?.14 ?.15 ?.16 ?.17 ?.18 ?.19 ?.20 ?.21 ?.22 ?.23 ?.24 ?.25 ?.26 ?.27 ?.28 ?.29 ?.A ?.C ?.None ?.SH1 ?.SH2 ?.SH3 ?.SH4
copper on no net: | length 2113.5
  Top Layer w0.254: 57.935,63.373 60.321,63.373 ; 59.558,58.573 63.721,58.573 ; 60.13,90.043 61.116,90.043 ; 60.321,60.198 60.321,63.373 ; 60.321,67.175 60.321,63.373 ; 63.511,72.386 65.298,72.386 ; 63.524,58.728 63.524,61.748 ; 64.063,63.373 60.321,63.373 ; 64.516,57.373 63.721,58.168 63.721,58.573 ; 64.604,84.84 66.335,84.84 ; 65.298,71.389 65.298,72.386 ; 65.298,73.198 65.298,72.386 ; 65.338,97.563 65.338,98.39 67.65,98.39 ; 65.786,99.949 67.437,99.949 68.072,99.314 71.681,99.314 ; 65.913,100.838 v2(67.691,100.838) ; 66.148,101.6 67.078,101.6 67.691,102.213 67.691,107.315 69.088,108.712 ; 66.335,83.953 66.335,84.84 ; 66.335,86.185 66.335,84.84 ; 66.548,108.712 66.548,110.49 66.04,110.998 59.309,110.998 57.912,109.601 57.912,89.535 58.928,88.519 71.108,88.519 73.047,86.58 73.047,82.865 ; 67.092,72.386 65.298,72.386 ; 67.115,89.535 67.162,89.488 80.391,89.488 81.839,88.04 81.839,80.01 ; 67.365,58.573 63.721,58.573 ; 67.816,84.84 66.335,84.84 ; 69.596,60.071 69.85,59.817 ; 69.959,58.258 70.287,57.93 ; v2(69.977,98.679) 70.112,98.814 71.681,98.814 ; 70.529,92.949 70.529,95.239 70.112,95.656 70.112,97.408 70.518,97.814 71.681,97.814 ; 71.12,108.331 71.12,104.902 71.501,104.521 72.771,104.521 74.041,103.251 74.041,101.674 ; 71.255,67.797 72.39,67.797 ; 71.628,93.098 71.628,95.305 72.517,96.194 72.517,96.93 72.541,96.954 ; 71.681,99.814 73.974,99.814 ; 71.755,92.983 71.998,93.226 ; 72.263,92.983 76.581,92.983 ; 72.661,69.738 72.661,67.818 74.357,67.818 ; 73.025,101.69 v2(73.025,102.997) ; 73.041,94.996 73.041,96.954 ; 74.168,108.585 74.541,108.212 74.541,101.674 ; 75.322,92.994 75.322,93.71 75.322,94.615 ; v1(75.692,83.693) 78.81,83.693 79.364,83.139 79.364,74.168 81.523,72.009 v1(83.439,72.009) ; 76.581,91.183 80.112,91.183 80.242,91.313 ; 76.708,108.331 76.205,107.828 76.205,104.394 76.205,103.373 77.597,101.981 77.597,93.98 79.121,92.456 84.109,92.456 85.09,91.475 85.09,71.12 88.138,68.072 94.234,68.072 94.996,67.31 ; 77.248,78.85 77.343,78.755 ; v2(78.105,102.997) 78.105,104.394 ; 78.317,67.925 79.883,67.925 ; 79.883,69.436 79.883,67.925 ; 80.126,95.758 78.994,95.758 78.613,96.139 78.613,98.298 78.994,98.679 80.253,98.679 ; 80.153,100.965 78.867,100.965 78.105,100.203 78.105,94.361 78.867,93.599 80.253,93.599 ; 80.311,107.696 80.311,110.236 ; 81.26,67.925 79.883,67.925 ; 82.153,98.679 83.185,98.679 83.693,99.187 v2(83.693,99.822) ; 82.153,100.711 v2(83.693,100.711) ; 82.851,107.997 82.851,110.236 ; 84.455,65.659 84.709,65.913 ; 84.963,62.219 86.288,62.219 86.712,62.643 v1@86.712,63.856 ; 85.391,107.696 85.391,110.236 ; 86.835,107.154 87.377,107.696 87.931,107.696 ; 87.931,105.365 87.931,107.696 ; 87.931,110.236 87.931,107.696 ; 89.138,108.412 88.422,107.696 87.931,107.696 ; 89.455,59.436 89.455,61.976 ; 90.471,110.236 90.471,107.696 90.588,107.579 90.588,93.486 85.852,88.75 85.852,71.628 88.773,68.707 98.319,68.707 102.002,72.39 102.108,72.39 ; 91.948,62.023 91.995,61.976 91.995,59.436 ; 91.948,72.39 91.948,77.089 88.629,80.408 88.629,87.635 93.371,92.377 93.371,100.298 100.7,107.627 ; 91.948,80.01 91.948,89.821 94.021,91.894 94.021,98.934 102.956,107.87 ; 92.875,107.828 91.272,106.226 91.272,93.203 86.487,88.418 86.487,72.136 89.281,69.342 95.965,69.342 99.013,72.39 99.568,72.39 ; 93.011,107.696 93.011,110.236 ; 94.488,72.39 94.488,71.905 93.195,70.612 90.297,70.612 87.845,73.064 87.845,87.826 92.614,92.595 92.614,102.219 98.091,107.696 98.091,110.236 ; 94.488,80.01 92.675,81.823 92.675,89.371 107.683,104.379 107.683,107.873 107.125,107.315 ; 94.535,59.436 94.535,61.976 ; 94.742,62.23 94.742,67.056 95.631,67.945 99.395,67.945 100.538,69.088 103.378,71.928 103.378,73.914 104.267,74.803 120.396,74.803 124.968,79.375 124.968,80.01 124.968,83.566 123.317,85.217 123.317,86.36 123.19,86.487 ; 95.503,107.696 91.943,104.136 91.943,92.87 87.119,88.046 87.119,72.576 89.718,69.977 94.393,69.977 96.806,72.39 97.028,72.39 97.028,72.154 ; 95.551,107.696 95.551,110.236 ; 97.028,80.01 93.272,83.766 93.272,88.98 109.657,105.365 109.657,107.597 109.628,107.569 ; 97.075,59.436 97.075,61.976 ; 99.441,72.39 99.441,72.618 102.147,75.324 119.774,75.324 123.571,79.121 123.571,84.074 121.92,85.725 121.92,86.902 121.92,90.573 122.936,91.589 ; 99.568,80.01 93.988,85.59 93.988,88.717 111.24,105.969 112.446,107.175 112.179,107.442 ; 99.822,59.436 99.822,62.103 ; 100.631,107.696 100.631,110.236 ; 102.108,80.01 102.108,83.452 103.111,84.455 ; 102.155,59.436 102.155,61.976 ; 102.155,63.039 102.155,61.976 ; 103.171,107.696 103.171,110.236 ; 103.24,83.923 103.24,89.406 107.179,93.345 109.379,93.345 109.379,96.827 110.137,97.585 115.763,97.585 115.824,97.524 ; 104.648,80.01 104.648,82.711 105.228,83.291 ; 104.695,63.699 104.695,61.976 102.155,61.976 ; 104.775,59.516 104.775,62.23 ; 105.14,83.947 105.14,88.943 108.018,91.821 112.735,91.821 114.259,93.345 116.129,93.345 118.11,95.326 118.11,97.753 ; 106.675,88.263 106.675,89.178 107.875,89.178 ; 107.188,77.883 107.188,80.01 107.188,81.365 ; 107.235,59.229 107.235,61.976 ; 107.235,107.696 107.235,110.236 ; 109.118,88.166 107.875,88.166 107.875,89.178 ; 109.32,90.332 107.875,90.332 107.875,89.178 ; 109.728,70.514 109.728,72.39 109.728,73.747 ; 109.775,107.696 109.775,110.236 ; 110.085,89.178 109.258,89.178 107.875,89.178 ; 112.268,80.01 112.886,80.01 119.126,86.25 119.126,92.71 119.126,95.939 122.174,98.987 122.174,101.092 117.66,105.606 116.586,105.606 114.877,107.315 ; 112.315,59.229 112.315,61.976 112.315,72.343 ; 112.315,107.696 112.315,110.236 ; 114.808,62.023 114.808,72.39 ; 114.808,80.01 119.774,84.976 119.774,93.819 119.761,93.806 119.761,95.353 123.063,98.655 123.063,102.028 117.395,107.696 117.395,110.236 ; 114.855,59.436 114.855,61.976 ; 114.855,107.997 114.855,110.236 ; 117.348,62.023 117.348,72.39 ; 117.348,80.01 120.396,83.058 120.396,95.09 123.698,98.392 123.698,103.933 119.935,107.696 ; 117.395,59.436 117.395,61.976 ; 119.761,62.23 119.761,72.136 ; 119.935,59.436 119.935,61.976 ; 119.935,107.997 119.935,110.236 ; 120.015,80.137 120.904,81.026 120.904,94.5 124.345,97.941 124.345,105.271 123.444,106.172 123.444,106.727 122.475,107.696 ; 122.428,59.483 122.428,62.23 ; 122.428,80.01 122.428,81.534 121.412,82.55 121.412,93.853 125.015,97.456 125.015,107.776 ; 122.428,107.87 122.428,110.236 ; 122.449,62.277 122.449,64.742 122.449,69.671 122.449,72.136 ; 123.19,91.567 123.321,91.698 123.825,91.698 ; 124.663,85.805 125.345,86.487 125.73,86.487 ; 124.669,87.966 125.73,86.905 125.73,86.487 ; 124.951,85.026 125.73,85.805 125.73,86.487 ; 125.015,59.436 125.015,62.103 ; 125.015,107.696 125.015,110.236 ; 125.158,62.023 125.158,72.263 ; 126.746,85.794 126.053,86.487 125.73,86.487 ; 61.849,86.614 61.908,86.555 61.849,86.614
  Top Layer w0.4: 60.198,87.006 64.586,87.006 70.529,92.949 72.541,92.949 ; 60.968,81.966 60.968,80.468 v1(62.188,79.248) ; 62.848,81.966 62.848,80.772 63.36,80.26 63.64,80.26 ; 63.5,80.12 63.5,75.184 64.008,74.676 65.298,74.676 ; 74.097,71.628 74.097,75.899 75.541,77.343 77.104,77.343 ; 76.889,80.01 76.889,81.461 77.47,82.042 v1@77.978,82.042 ; 77.248,78.85 73.914,78.85 73.304,79.46 73.304,82.55 74.549,82.55 v1(75.692,83.693) 75.692,84.581 76.317,85.206 79.756,85.206 ; 85.09,64.119 85.09,65.775
  Top Layer w0.5: 60.016,87.006 61.457,87.006 61.849,86.614 ; 61.116,90.043 61.722,90.649 61.722,98.806 61.722,99.729 63.583,101.59 65.468,101.59 ; 61.908,84.455 61.908,86.555 ; 63.64,80.26 66.614,80.26 ; 99.615,61.976 99.615,66.107 104.648,71.14 104.648,72.39
  Top Layer w0.6: v1@58.608,79.756 58.608,77.981 58.674,78.047 58.674,75.057 ; 65.387,76.966 65.387,77.107 65.528,76.966 69.859,76.966 71.147,75.678 71.147,71.628 69.342,71.628 66.621,68.907 66.621,63.373 ; 73.147,71.628 75.046,71.628
  Top Layer w0.7: 70.287,57.93 106.825,57.93 107.235,58.34 107.235,59.436 ; 79.883,65.425 80.117,65.659 84.455,65.659 ; 84.963,65.775 90.308,65.775 91.948,64.135 91.948,62.023
  Top Layer w1: 66.621,63.373 68.152,63.373 69.596,61.929 69.596,60.071 ; 69.959,58.258 69.959,59.563 ; 72.722,65.257 72.722,63.246 74.059,61.909 74.059,59.563
  Bottom Layer w0.254: v1@58.801,79.716 58.888,79.803 58.888,80.727 58.89,80.729 58.238,81.382 58.238,104.328 60.971,107.061 68.58,107.061 68.961,107.442 68.961,108.712 ; 66.538,110.48 66.538,108.722 66.548,108.712 ; v2(67.691,100.838) 67.691,100.584 68.326,99.949 68.326,98.933 68.58,98.679 v2(69.977,98.679) ; 71.628,108.331 71.628,101.346 72.517,100.457 82.55,100.457 82.677,100.457 83.312,99.822 v2(83.693,99.822) ; 71.628,108.712 71.628,109.703 73.431,111.506 123.952,111.506 124.968,110.49 ; v2(73.025,102.997) v2(78.105,102.997) ; 73.914,108.331 74.168,108.331 73.66,108.331 72.771,107.442 72.771,105.283 72.136,104.648 72.136,101.6 72.898,100.838 v2@83.566,100.838 ; 74.168,108.712 74.168,107.188 74.676,106.68 77.688,106.68 78.45,107.442 78.45,108.803 78.613,108.966 121.205,108.966 122.475,107.696 ; v1@77.724,81.788 v1@77.978,82.042 ; 80.01,107.823 80.01,103.759 80.645,103.124 83.522,103.124 84.832,101.814 84.832,99.201 81.28,95.649 81.28,73.941 81.28,59.166 82.915,57.531 124.206,57.531 124.968,58.293 124.968,59.182 ; 82.55,107.696 82.55,104.013 82.931,103.632 84.051,103.632 85.483,102.199 85.483,98.778 82.053,95.347 82.053,59.296 83.183,58.166 83.234,58.166 121.92,58.166 122.475,58.721 122.475,59.436 ; v1@83.074,72.009 83.074,65.897 83.312,65.659 95.852,65.659 97.075,64.436 97.075,61.976 ; 85.217,107.569 86.995,105.791 117.094,105.791 119.761,103.124 119.761,95.373 116.321,91.933 100.84,91.933 90.603,81.696 90.603,78.486 90.603,77.926 90.603,70.941 91.361,70.183 105.489,70.183 107.188,71.882 107.188,72.39 ; 85.391,107.696 85.471,107.616 ; v1(86.97,64.019) 88.936,64.019 89.455,63.5 89.563,63.5 94.361,63.5 94.742,63.119 94.742,62.23 ; 91.995,61.976 92.032,61.976 93.345,60.663 99.064,60.663 99.615,61.214 99.615,61.976 ; 97.028,72.39 97.028,71.496 97.645,70.879 102.629,70.879 103.378,71.628 103.378,82.376 104.013,83.011 105.741,84.739 107.524,86.522 ; 99.822,62.103 99.441,62.484 99.441,63.627 100.965,65.151 101.346,65.151 121.113,65.151 126.539,70.577 126.539,82.423 127,82.884 127,84.991 127,89.206 127,91.313 126.746,91.567 125.73,91.567 126.365,91.567 ; 102.235,72.6 102.235,77.759 100.842,79.152 100.842,89.394 102.38,90.932 121.285,90.932 123.19,89.027 ; 104.648,72.39 104.648,72.733 109.766,77.851 109.766,79.972 109.728,80.01 ; 107.516,86.522 108.977,87.983 111.466,87.983 ; 111.292,87.943 121.331,87.943 121.487,87.787 123.9,87.787 124.079,87.966 124.669,87.966 125.73,89.027 ; 112.375,82.678 124.205,82.678 124.93,81.953 124.93,80.391
  Bottom Layer w0.4: v1(62.188,79.248) 62.188,85.483 62.857,86.152 71.288,86.152 73.752,88.617 76.562,88.617 77.724,87.455 v1@77.724,81.788
  Bottom Layer w0.7: v1@58.801,79.716 58.801,78.174 58.801,71.488 63.36,66.929 63.36,62.567 66.506,59.421 75.624,59.421 76.455,60.252 76.455,62.591 79.067,65.203 79.821,65.203
  other v1: 89.321,77.216 58.801,79.629 77.724,82.169

## Polygon pours and split planes (outlines as drawn)
no net on Bottom Layer (solid, pour order 2): 58.649,112.116 126.263,112.116 127.381,110.998 127.381,57.912 126.492,57.023 58.166,57.023 57.381,57.808 57.381,110.848
no net on Top Layer (solid, pour order 0): 58.649,112.116 126.263,112.116 127.381,110.998 127.381,57.912 126.492,57.023 58.166,57.023 57.381,57.808 57.381,110.848

## Silkscreen, mask and mechanical layers (free items; w line width, h text height)
Top Overlay:
  lines w0.254: 79.403,103.84 79.403,103.223 79.756,102.87 83.423,102.87 ; 83.82,104.013 83.82,103.267 83.423,102.87 ; 84.328,101.981 84.328,99.711 84.598,99.441 88.466,99.441 89.027,100.002 89.027,101.6 88.763,101.864 84.445,101.864 83.439,102.87 83.423,102.87 ; 87.757,64.262 87.757,66.294 88.519,67.056 88.646,67.056 108.458,67.056 108.458,67.048 109.093,66.413 109.093,64.262 ; 89.154,105.918 89.154,104.394 89.535,104.013 90.043,103.505 120.142,103.505 120.904,104.267 120.904,106.045 ; 110.998,64.008 110.998,64.897 111.633,65.532 126.111,65.532 126.139,65.532 126.619,65.052 126.619,64.008 ; 121.896,104.704 122.348,105.156 122.769,104.735 ; 122.301,103.505 122.301,104.648 ; 124.627,103.728 125.048,103.307 125.5,103.759 ; 125.095,103.815 125.095,104.958
  text "GRD" at 61.722,110.363 h1.52
  text "3.3V" at 65.151,110.363 h1.52
  text "5V" at 68.453,110.363 h1.52
  text "TX" at 70.739,110.363 h1.52
  text "RX" at 73.279,110.363 h1.52
  text "DTR" at 75.692,110.363 h1.52
  text "UART" at 58.293,107.823 h1.52
  text "1" at 122.809,105.537 h1.52 r90
  text "8" at 103.759,105.41 h1.52 r90
  text "7" at 107.823,105.41 h1.52 r90
  text "4" at 115.443,105.41 h1.52 r90
  text "2" at 120.269,105.41 h1.52 r90
  text "0" at 125.476,105.41 h1.52 r90
  text "12" at 93.427,104.775 h1.52 r90
  text "13" at 91.122,104.648 h1.52 r90
  text "~9" at 101.194,104.648 h1.52 r90
  text "~6" at 110.226,104.648 h1.52 r90
  text "~5" at 112.776,104.648 h1.52 r90
  text "~3" at 117.856,104.648 h1.52 r90
  text "~11" at 96.027,103.886 h1.52 r90
  text "~10" at 98.487,103.886 h1.52 r90
  text "SCL" at 80.899,103.505 h1.52 r90
  text "SDA" at 83.312,103.378 h1.52 r90
  text "GRD" at 88.265,102.87 h1.52 r90
  text "AREF" at 85.725,102.489 h1.52 r90
  text "U1" at 70.485,102.362 h1.52
  text "TX" at 121.412,102.19 h1.52
  text "RX" at 124.079,102.108 h1.52
  text "DIGITAL I/O" at 98.568,101.864 h1.52
  text "( ~ PWM )" at 107.395,101.864 h1.52
  text "I2C" at 84.709,99.99 h1.52
  text "TX" at 83.439,95.123 h1.52
  text "RX" at 83.566,92.837 h1.52
  text "PWR" at 83.566,90.551 h1.52
  text "TECKDUINO REV A" at 90.471,90.297 h1.52
  text "ICSP" at 121.666,83.185 h1.52
  text "POWER" at 95.758,67.691 h1.52
  text "ANALOG IN" at 115.189,66.04 h1.52
  text "5V" at 92.329,63.627 h1.52 r90
  text "RES" at 95.123,63.627 h1.52 r90
  text "3.3V" at 97.663,63.627 h1.52 r90
  text "5V" at 100.076,63.627 h1.52 r90
  text "GRD" at 102.616,63.5 h1.52 r90
  text "GRD" at 105.156,63.5 h1.52 r90
  text "VIN" at 107.823,63.5 h1.52 r90
  text "A0" at 112.776,63.5 h1.52 r90
  text "A1" at 115.189,63.5 h1.52 r90
  text "A2" at 117.729,63.5 h1.52 r90
  text "A3" at 120.269,63.5 h1.52 r90
  text "A4" at 122.809,63.5 h1.52 r90
  text "A5" at 125.349,63.5 h1.52 r90
Bottom Overlay:
  text "MADE IN MAURITIUS" at 114.792,96.647 h1.52
  text "www.tecknologg.website" at 118.11,91.313 h1.52
Mechanical 1:
  lines w0.1: 126.111,57.15 126.111,57.25 ; 126.238,60.579 126.365,60.579
  lines w0.254: 126.492,60.325 126.492,57.023 ; 126.492,57.023 127.381,57.912 127.381,110.998 126.263,112.116 58.649,112.116 58.293,111.76 57.381,110.848 57.381,57.808 58.166,57.023 126.492,57.023

## Text inside footprints (layer, text, board x,y; h text height)
?: Top Overlay "+" at 73.411,61.943 h1.5 r90
?: Top Overlay "+" at 80.633,62.05 h1.5 r90
?: Top Overlay "2" at 125.222,94.107 h1.27 r270; Top Overlay "1" at 122.682,93.599 h1.27 r270